# EAGLE board pic_can_relay_v2 (EAGLE 4.16)
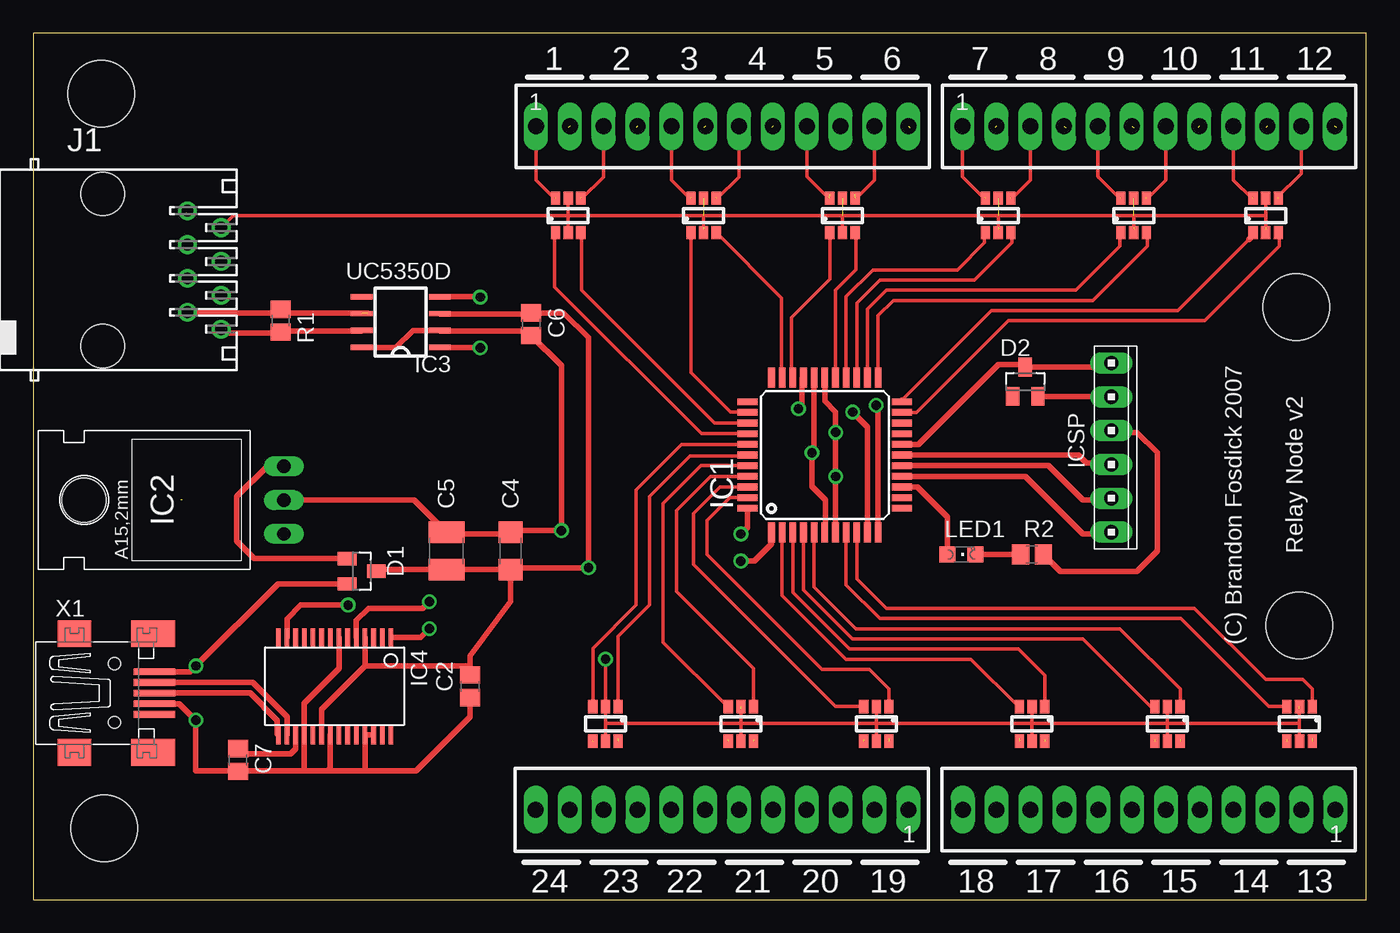
[diagram p0: board, top side]
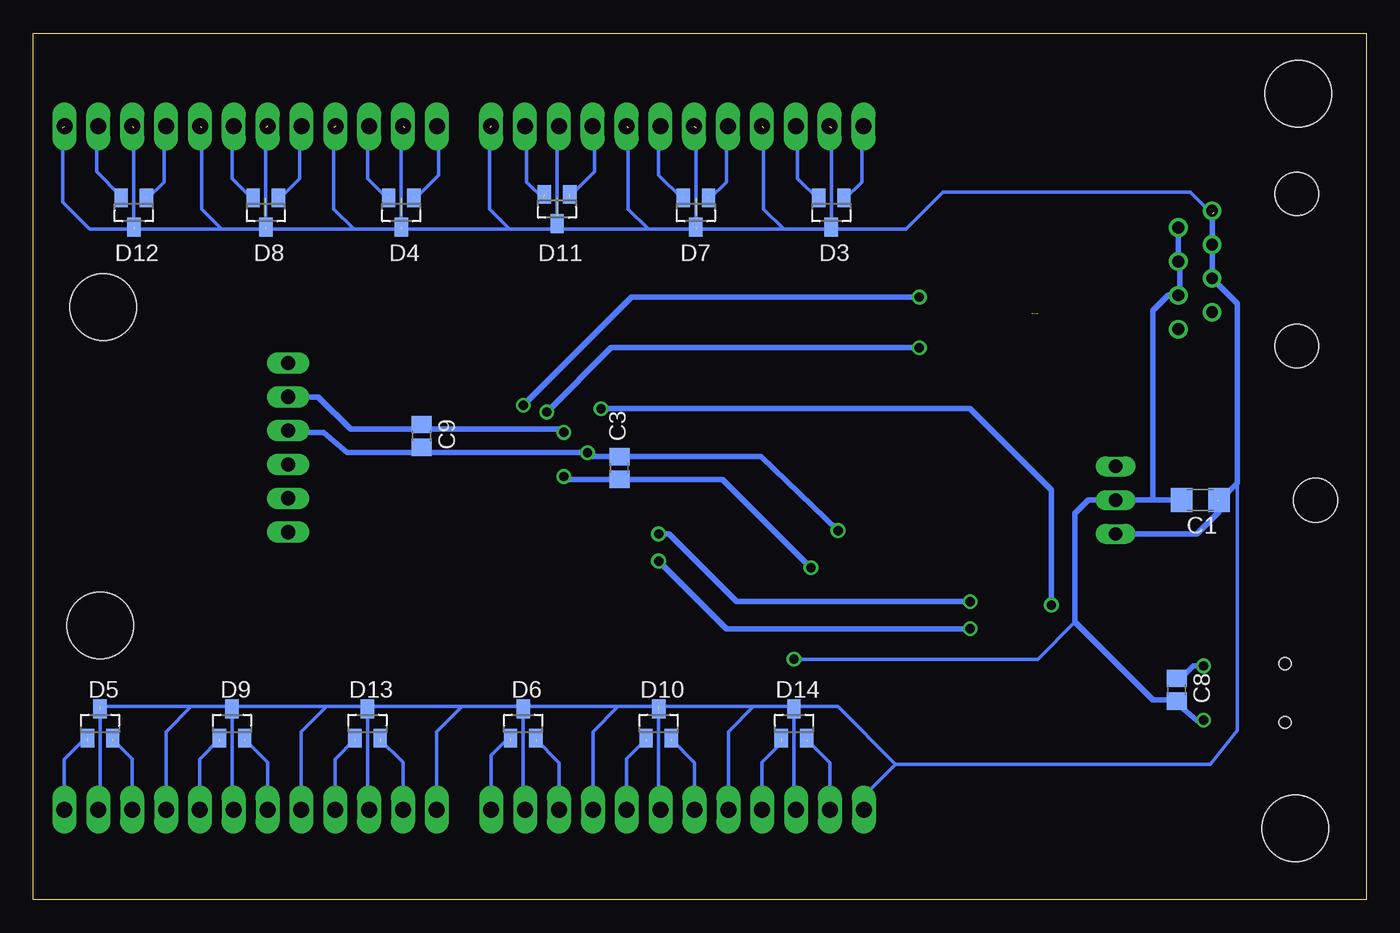
[diagram p1: board, bottom side, seen from below]

Size 100 x 65 mm. Coordinates in mm from the lower left corner, seen from the top.
Outline: 0,0 100,0 100,65 0,65 0,0
Copper layers (1*16): Top 0.035mm / dielectric 1.5mm / Bottom 0.035mm
Design rules "default": minimum track width 10mil, minimum drill 24mil, track to track 8mil, track to pad 8mil, pad to pad 8mil, via to via 8mil, smd to smd 8mil, copper to edge 40mil, drill to drill 8mil, minimum pad ring 10mil, minimum via ring 8mil, stop-mask expansion 0mil, vias tented up to drill 0mil, thermal gap 10mil
Holes 5 mm at 5.08,60.45 5.33,5.33 94.74,44.45 95,20.57

## Footprints (pad centres in the part's own frame; a part is rotated, then mirrored left to right if it is on the bottom)
C1206 = smd 1.6 x 1.8: 1 -1.4,0; 2 1.4,0
C0805 = smd 1.3 x 1.5: 1 -0.85,0; 2 0.85,0
C1210 = smd 1.6 x 2.7: 1 -1.4,0; 2 1.4,0
SOT23 = smd 1 x 1.4: 1 -0.95,-1.1; 2 0.95,-1.1; 3 0,1.1
TQFP44 = smd 1.5 x 0.5: 1 -5.8,4; 2 -5.8,3.2; 3 -5.8,2.4; 4 -5.8,1.6; 5 -5.8,0.8; 6 -5.8,0; 7 -5.8,-0.8; 8 -5.8,-1.6; 9 -5.8,-2.4; 10 -5.8,-3.2; 11 -5.8,-4; 23 5.8,-4; 24 5.8,-3.2; 25 5.8,-2.4; 26 5.8,-1.6; 27 5.8,-0.8; 28 5.8,0; 29 5.8,0.8; 30 5.8,1.6; 31 5.8,2.4; 32 5.8,3.2; 33 5.8,4 | smd 0.5 x 1.5: 12 -4,-5.8; 13 -3.2,-5.8; 14 -2.4,-5.8; 15 -1.6,-5.8; 16 -0.8,-5.8; 17 0,-5.8; 18 0.8,-5.8; 19 1.6,-5.8; 20 2.4,-5.8; 21 3.2,-5.8; 22 4,-5.8; 34 4,5.8; 35 3.2,5.8; 36 2.4,5.8; 37 1.6,5.8; 38 0.8,5.8; 39 0,5.8; 40 -0.8,5.8; 41 -1.6,5.8; 42 -2.4,5.8; 43 -3.2,5.8; 44 -4,5.8
78XXL = drill 1 long: GND 0,-3.81; IN -2.54,-3.81; OUT 2.54,-3.81 | hole 3.302: 0,11.176
SOIC8 = smd 1.626 x 0.406: CANH 2.934,1.27; CANL 2.934,0; GND -2.934,1.27; RS 2.934,2.54; RXD -2.934,-1.27; TXN -2.934,2.54; VCC -2.934,0; VREF 2.934,-1.27
SSOP28DB = smd 0.348 x 1.397: 1 -4.225,-3.656; 2 -3.575,-3.656; 3 -2.925,-3.656; 4 -2.275,-3.656; 5 -1.625,-3.656; 6 -0.975,-3.656; 7 -0.325,-3.656; 8 0.325,-3.656; 9 0.975,-3.656; 10 1.625,-3.656; 11 2.275,-3.656; 12 2.925,-3.656; 13 3.575,-3.656; 14 4.225,-3.656; 15 4.225,3.656; 16 3.575,3.656; 17 2.925,3.656; 18 2.275,3.656; 19 1.625,3.656; 20 0.975,3.656; 21 0.325,3.656; 22 -0.325,3.656; 23 -0.975,3.656; 24 -1.625,3.656; 25 -2.275,3.656; 26 -2.925,3.656; 27 -3.575,3.656; 28 -4.225,3.656
10X06MTA = drill 1.067 long: 1 6.35,0; 2 3.81,0; 3 1.27,0; 4 -1.27,0; 5 -3.81,0; 6 -6.35,0
555166-1 = drill 0.889 round: 1 -4.445,5.207; 2 -3.175,7.747; 3 -1.905,5.207; 4 -0.635,7.747; 5 0.635,5.207; 6 1.905,7.747; 7 3.175,5.207; 8 4.445,7.747 | hole 3.251: -5.715,-1.143; 5.715,-1.143
CHIPLED_0805 = smd 1.2 x 1.2: A 0,-1.05; C 0,1.05
R0805 = smd 1.3 x 1.5: 1 -0.85,0; 2 0.85,0
MPT0.5/12-2.54 = drill 1.2 long: 1 -12.7,0; 2 -10.16,0; 3 -7.62,0; 4 -5.08,0; 5 -2.54,0; 6 0,0; 7 2.54,0; 8 5.08,0; 9 7.62,0; 10 10.16,0; 11 12.7,0; 12 15.24,0
SOT-6 = smd 0.69 x 0.99: 1 -0.95,0; 2 0,0; 3 0.95,0; 4 0.95,2.59; 5 0,2.59; 6 -0.95,2.59
32005-301 = smd 3.1 x 0.5: 1 3,1.6; 2 3,0.8; 3 3,0; 4 3,-0.8; 5 3,-1.6 | smd 2.5 x 2: M1 -3,-4.45; M2 -3,4.45 | smd 3.3 x 2: M3 2.9,4.45; M4 2.9,-4.45 | hole 0.9: 0,2.2; 0,-2.2

## Placement (x,y rotation side)
C1  1uF  [C1206]  12.45,29.97 180 bottom
C2  0.1uF  [C0805]  32.77,16 270 top
C3  0.1uF  [C0805]  56.03,32.38 90 bottom
C4  1uF  [C1206]  35.81,26.16 90 top
C5  10uF  [C1210]  30.99,26.16 90 top
C6  0.1uF  [C0805]  37.36,43.17 270 top
C7  0.1uF  [C0805]  15.36,10.47 270 top
C8  10nF  [C0805]  14.22,15.75 270 bottom
C9  0.1uF  [C0805]  70.87,34.8 270 bottom
D1  BAS70-05  [SOT23]  24.64,24.64 270 top
D2  BAS70-05  [SOT23]  74.42,38.86 0 top
D3  BAS70-05  [SOT23]  40.13,51.56 180 bottom
D4  BAS70-05  [SOT23]  72.39,51.56 180 bottom
D5  BAS70-05  [SOT23]  95,13.21 0 bottom
D6  BAS70-05  [SOT23]  63.25,13.21 0 bottom
D7  BAS70-05  [SOT23]  50.29,51.56 180 bottom
D8  BAS70-05  [SOT23]  82.55,51.56 180 bottom
D9  BAS70-05  [SOT23]  85.09,13.21 0 bottom
D10  BAS70-05  [SOT23]  53.09,13.21 0 bottom
D11  BAS70-05  [SOT23]  60.71,51.82 180 bottom
D12  BAS70-05  [SOT23]  92.46,51.56 180 bottom
D13  BAS70-05  [SOT23]  74.93,13.21 0 bottom
D14  BAS70-05  [SOT23]  42.93,13.21 0 bottom
IC1  PIC18F4580F-I/PT  [TQFP44]  59.38,33.35 90 top
IC2  [78XXL]  14.99,29.97 90 top
IC3  UC5350D  [SOIC8]  27.56,43.97 180 top
IC4  FT232RL  [SSOP28DB]  22.61,16 180 top
ICSP  [10X06MTA]  80.88,33.92 270 top
J1  [555166-1]  6.35,47.24 270 top
LED1  [CHIPLED_0805]  69.63,25.89 270 top
R1  60  [R0805]  18.54,43.43 270 top
R2  270  [R0805]  74.93,25.91 0 top
TB1  MPT0.5/12-2.54  [MPT0.5/12-2.54]  50.41,58.02 0 top
TB2  MPT0.5/12-2.54  [MPT0.5/12-2.54]  82.42,58.02 0 top
TB3  MPT0.5/12-2.54  [MPT0.5/12-2.54]  84.97,6.75 180 top
TB4  MPT0.5/12-2.54  [MPT0.5/12-2.54]  52.94,6.74 180 top
U$1  NDC7002N"  [SOT-6]  40.13,50.04 0 top
U$2  NDC7002N"  [SOT-6]  50.29,50.04 0 top
U$3  NDC7002N"  [SOT-6]  60.71,50.04 0 top
U$4  NDC7002N"  [SOT-6]  72.39,50.04 0 top
U$5  NDC7002N"  [SOT-6]  82.55,50.04 0 top
U$6  NDC7002N"  [SOT-6]  92.46,50.04 0 top
U$7  NDC7002N"  [SOT-6]  95,14.48 180 top
U$8  NDC7002N"  [SOT-6]  85.09,14.48 180 top
U$9  NDC7002N"  [SOT-6]  74.93,14.48 180 top
U$10  NDC7002N"  [SOT-6]  63.25,14.48 180 top
U$11  NDC7002N"  [SOT-6]  53.09,14.48 180 top
U$12  NDC7002N"  [SOT-6]  42.93,14.48 180 top
X1  MINI-USB-32005-301  [32005-301]  6.1,15.49 0 top

## Library data of the parts
C1-C9 R1 R2 = rcl
D1-D14 = diode
IC1 = microchip-pic18f2480_2580_4480_4580
IC2 = v-reg
IC3 TB1-TB4 U$1-U$12 = house
IC4 = ftdichip
ICSP J1 = con-amp
LED1 = led
X1 = con-cypressindustries

## Nets
+5V: C2.1 C3.1 C4.1 C5.1 C6.1 C9.1 D1.3 D2.2 IC1.7 IC1.28 IC3.VCC IC4.4 IC4.20 ICSP.5
+12V: C1.1 D3.3 D4.3 D5.3 D6.3 D7.3 D8.3 D9.3 D10.3 D11.3 D12.3 D13.3 D14.3 IC2.IN J1.1 J1.3 J1.5 TB1.2 TB1.4 TB1.6 TB1.8 TB1.10 TB1.12 TB2.2 TB2.4 TB2.6 TB2.8 TB2.10 TB2.12 TB3.2 TB3.4 TB3.6 TB3.8 TB3.10 TB3.12 TB4.2 TB4.4 TB4.6 TB4.8 TB4.10 TB4.12
CANH: IC3.CANH J1.8 R1.2
CANL: IC3.CANL J1.7 R1.1
CANRX: IC1.11 IC3.RXD
CANTX: IC1.10 IC3.TXN
CLK: IC1.30 IC4.13
G1: IC1.37 U$1.1
G2: IC1.36 U$1.3
G3: IC1.35 U$2.1
G4: IC1.32 U$2.3
G5: IC1.31 U$3.1
G6: IC1.27 U$3.3
G7: IC1.26 U$4.1
G8: IC1.25 U$4.3
G9: IC1.24 U$5.1
G10: IC1.23 U$5.3
G11: IC1.22 U$6.1
G12: IC1.21 U$6.3
G13: IC1.9 U$7.1
G14: IC1.8 U$7.3
G15: IC1.5 U$8.1
G16: IC1.4 U$8.3
G17: IC1.3 U$9.1
G18: IC1.2 U$9.3
G19: IC1.43 U$10.1
G20: IC1.42 U$10.3
G21: IC1.41 U$11.1
G22: IC1.40 U$11.3
G23: IC1.39 U$12.1
G24: IC1.38 U$12.3
GND: C1.2 C2.2 C3.2 C4.2 C5.2 C6.2 C7.2 C8.2 C9.2 IC1.6 IC1.29 IC2.GND IC3.GND IC3.RS IC4.7 IC4.18 IC4.21 IC4.25 IC4.26 ICSP.4 J1.2 J1.4 J1.6 R2.2 U$1.2 U$1.5 U$2.2 U$2.5 U$3.2 U$3.5 U$4.2 U$4.5 U$5.2 U$5.5 U$6.2 U$6.5 U$7.2 U$7.5 U$8.2 U$8.5 U$9.2 U$9.5 U$10.2 U$10.5 U$11.2 U$11.5 U$12.2 U$12.5 X1.4
LED1: IC1.14 LED1.A
MCLR: D2.3 IC1.18 ICSP.6
N$1: D1.1 IC2.OUT
N$2: LED1.C R2.1
N$5: C7.1 IC4.17
PGC: IC1.16 ICSP.2
PGD: IC1.17 ICSP.3
PGM: IC1.15 ICSP.1
PWREN#: IC4.14
R1: D3.1 TB1.1 U$1.6
R2: D3.2 TB1.3 U$1.4
R3: D7.1 TB1.5 U$2.6
R4: D7.2 TB1.7 U$2.4
R5: D11.1 TB1.9 U$3.6
R6: D11.2 TB1.11 U$3.4
R7: D4.1 TB2.1 U$4.6
R8: D4.2 TB2.3 U$4.4
R9: D8.1 TB2.5 U$5.6
R10: D8.2 TB2.7 U$5.4
R11: D12.1 TB2.9 U$6.6
R12: D12.2 TB2.11 U$6.4
R13: D5.1 TB3.1 U$7.6
R14: D5.2 TB3.3 U$7.4
R15: D9.1 TB3.5 U$8.6
R16: D9.2 TB3.7 U$8.4
R17: D13.1 TB3.9 U$9.6
R18: D13.2 TB3.11 U$9.4
R19: D6.1 TB4.1 U$10.6
R20: D6.2 TB4.3 U$10.4
R21: D10.1 TB4.5 U$11.6
R22: D10.2 TB4.7 U$11.4
R23: D14.1 TB4.9 U$12.6
R24: D14.2 TB4.11 U$12.4
RX: IC1.1 IC4.1
TX: IC1.44 IC4.5
USB+: IC4.15 X1.3
USB-: IC4.16 X1.2
USB_5V: C8.1 D1.2 X1.1
USB_SHIELD: X1.5

## Tracks (layer width: path | path; a pad name or v marks a point on that pad's centre or on a via)
+5V  (via drill 0.7)
  Top 0.406: IC4.20 21.63,14.27 24.89,17.53 | IC4.4 24.88,19.57 24.89,19.56 24.89,17.53 | D1.3 25.65,24.64 25.78,24.76 C5.1 30.86,24.76 | C4.1 30.86,24.76 | 30.86,24.76 30.73,24.64 | 32.77,17.53 32.77,18.29 35.81,22.35 C4.1 | 32.77,17.53 C2.1 32.93,16.85 33.02,16.76 | 24.89,17.53 32.77,17.53 | C4.1 35.94,24.89 v41.66,24.89 41.66,28.45 | 41.66,28.45 41.66,28.7 | 41.66,28.45 41.66,42.16 39.8,44.02 C6.1 37.34,44 37.34,43.94 30.52,43.94 IC3.VCC | IC1.28 59.38,37.4 60.2,36.58 v60.2,35.05 v60.2,31.75 60.2,27.69 60.18,27.67 IC1.7 | 80.77,37.59 80.77,37.62 ICSP.5 80.77,37.85 80.69,37.76 D2.2
  Bottom 0.406: v60.2,31.75 60.16,31.53 C3.1 48.29,31.53 v41.66,24.89 | ICSP.5 78.62,37.73 76.2,35.31 70.36,35.31 | 70.36,35.31 59.94,35.31 v60.2,35.05 | 70.36,35.31 C9.1
+12V  (19 unrouted)
  Bottom 0.254: 11.56,51.44 13.21,53.09 31.75,53.09 34.54,50.29 40.13,50.29 | 40.13,50.29 D3.3 | 97.79,57.91 97.79,52.32 95.76,50.29 92.46,50.29 | 40.13,50.29 43.69,50.29 | 43.69,50.29 50.29,50.29 | 50.29,50.29 53.85,50.29 | 53.85,50.29 60.71,50.29 | 60.71,50.29 64.26,50.29 | 64.26,50.29 72.39,50.29 | 72.39,50.29 75.95,50.29 | 75.95,50.29 82.55,50.29 | 82.55,50.29 85.85,50.29 | 85.85,50.29 92.46,50.29 | 92.46,50.29 92.46,57.91 | 82.55,50.29 82.55,57.91 | 72.39,50.29 72.39,57.66 72.14,57.91 | 50.29,50.29 50.29,57.91 | 40.13,50.29 40.13,57.91 | 87.38,57.91 87.38,51.82 85.85,50.29 | 77.47,57.91 77.47,51.82 75.95,50.29 | 65.79,57.91 65.79,51.82 64.26,50.29 | 55.37,57.91 55.37,51.82 53.85,50.29 | 45.21,57.91 45.21,51.82 43.69,50.29 | TB3.2 95,6.88 D5.3 | 85.09,14.48 88.14,14.48 | 88.14,14.48 95,14.48 | 56.13,14.48 53.09,14.48 45.97,14.48 | 56.13,14.48 63.25,14.48 | 63.25,14.48 67.82,14.48 | 67.82,14.48 74.93,14.48 | 74.93,14.48 77.98,14.48 | 77.98,14.48 85.09,14.48 | 42.93,14.48 45.97,14.48 | TB3.4 90.05,12.57 88.14,14.48 | 85.09,14.48 D9.3 | TB3.6 85.09,6.87 85.09,14.48 | TB3.8 79.89,12.57 77.98,14.48 | 74.93,14.22 D13.3 74.93,14.48 | TB3.12 69.73,12.57 67.82,14.48 | 63.25,14.48 D6.3 | TB4.2 63.25,6.88 63.25,14.48 | TB4.4 58.02,12.59 56.13,14.48 | TB4.6 53.09,6.88 D10.3 | TB4.8 47.86,12.59 45.97,14.48 | 42.93,14.48 D14.3 | TB4.10 arc90 42.93,6.88 42.93,14.48 | 11.18,29.97 11.18,29.21 | 35.31,10.16 11.68,10.16 9.65,12.7 9.65,31.24 | 35.31,10.16 39.62,14.48 42.93,14.48 | TB4.12 37.7,7.77 35.31,10.16 | TB3.10 arc90 74.93,6.87 74.93,14.48 | 60.71,50.29 60.71,50.55 | 60.71,50.55 D11.3 | TB1.10 60.71,57.89 60.71,50.55
  Bottom 0.406: IC2.IN 12.7,27.43 11.05,29.09 C1.1 10.92,29.97 9.65,31.24 9.65,44.7 J1.5 | J1.5 11.68,46.74 | J1.5 11.56,48.9 11.43,49.02 J1.3 11.56,51.44 | J1.1 11.43,51.56
CANH
  Top 0.406: J1.8 14.45,42.63 14.45,42.52 18.57,42.52 | 18.57,42.52 R1.2 | IC3.CANH 24.64,42.69 24.64,42.67 18.72,42.67 18.57,42.52
CANL  (1 unrouted)
  Top 0.406: J1.7 11.95,44.02 18.43,44.02 R1.1 18.77,44.02 25.07,44.02
CANRX  (via drill 0.7)
  Top 0.406: v33.53,45.21 33.78,45.21 33.75,45.24 IC3.RXD | IC1.11 63.38,36.95 v63.25,37.08
  Bottom 0.406: v33.53,45.21 55.12,45.21 v63.25,37.08
CANTX  (via drill 0.7)
  Top 0.406: IC3.TXN 33.5,41.43 v33.53,41.4 | IC1.10 62.58,35.47 v61.47,36.58
  Bottom 0.406: v33.53,41.4 56.64,41.4 v61.47,36.58
CLK  (via drill 0.7)
  Top 0.406: IC4.13 19.03,21.06 20.07,22.1 v23.62,22.1 | IC1.30 57.74,39.12 57.66,39.12 57.66,37.08 v57.4,36.83
  Bottom 0.406: v23.62,22.1 23.62,30.73 29.72,36.83 v57.4,36.83
G1
  Top 0.254: IC1.37 50.14,34.95 39.12,45.97 39.12,50.04 U$1.1
G2
  Top 0.254: IC1.36 51.12,35.75 41.15,45.72 41.15,50.04 U$1.3
G3
  Top 0.254: U$2.1 49.34,39.56 52.32,36.58 53.59,36.58 53.58,36.56 IC1.35
G4
  Top 0.254: IC1.32 56.14,39.12 56.13,39.12 56.13,45.15 U$2.3
G5
  Top 0.254: IC1.31 56.94,39.12 56.9,39.12 56.9,43.69 59.76,46.55 U$3.1
G6
  Top 0.254: IC1.27 60.18,45.74 61.72,47.28 61.72,50.04 U$3.3
G7
  Top 0.254: IC1.26 60.98,45.23 62.99,47.24 69.34,47.24 71.37,49.28 71.37,50.04 U$4.1
G8
  Top 0.254: IC1.25 61.78,44.76 63.5,46.48 70.61,46.48 73.41,49.28 73.41,50.04 U$4.3
G9
  Top 0.254: IC1.24 62.58,44.29 64.01,45.72 78.23,45.72 81.53,49.02 81.53,50.04 U$5.1
G10
  Top 0.254: IC1.23 63.38,43.82 64.52,44.96 79.5,44.96 83.57,49.02 83.57,50.04 U$5.3
G11
  Top 0.254: 65.18,37.49 71.88,44.2 85.85,44.2 91.19,49.53 | U$6.1 91.44,50.04 91.44,49.78
  Top 0.406: IC1.22 65.18,37.49 | 91.19,49.53 91.44,49.78
G12
  Top 0.254: IC1.21 66.27,36.55 73.15,43.43 87.88,43.43 93.47,49.02 93.47,50.04 U$6.3
G13
  Top 0.254: IC1.9 61.78,24.07 64.01,21.84 87.12,21.84 92.46,16.51 95.25,16.51 95.95,15.81 U$7.1
G14
  Top 0.254: IC1.8 60.98,23.6 63.5,21.08 86.11,21.08 92.71,14.48 U$7.3
G15
  Top 0.254: IC1.5 58.58,23.46 61.72,20.32 80.77,20.32 81.53,20.32 86.04,15.81 U$8.1
G16
  Top 0.254: IC1.4 57.78,23.25 61.47,19.56 78.74,19.56 83.82,14.48 U$8.3
G17
  Top 0.254: IC1.3 56.98,23.03 61.21,18.8 73.91,18.8 75.88,16.83 U$9.1
G18
  Top 0.254: IC1.2 56.18,22.81 60.96,18.03 70.36,18.03 73.91,14.48 U$9.3
G19
  Top 0.254: IC1.43 52.25,30.15 50.55,28.45 50.55,25.91 59.18,17.27 62.74,17.27 64.2,15.81 U$10.1
G20
  Top 0.254: IC1.42 51.53,30.95 49.53,28.96 49.53,25.15 60.2,14.48 U$10.3
G21
  Top 0.254: IC1.41 50.8,31.75 48.26,29.21 48.26,23.11 54.04,17.34 U$11.1
G22
  Top 0.254: IC1.40 50.08,32.55 47.24,29.72 47.24,22.61 47.24,19.3 52.07,14.48 U$11.3
G23
  Top 0.254: 53.5,33.27 49.28,33.27 46.23,30.23 46.23,22.1 43.88,19.75 U$12.1
  Top 0.406: 53.5,33.27 IC1.39
G24
  Top 0.254: IC1.38 48.63,34.15 45.21,30.73 45.21,22.1 41.98,18.86 U$12.3
GND  (via drill 0.7)  (4 unrouted)
  Top 0.254: 40.13,51.31 U$1.5 | 40.13,51.31 50.29,51.31 | 50.29,51.31 60.71,51.31 | 60.71,51.31 72.39,51.31 | 72.39,51.31 82.55,51.31 | 82.55,51.31 92.46,51.31 | 92.46,51.31 U$6.5 | 92.46,51.31 U$6.2 | 82.55,51.31 U$5.2 | 72.39,51.31 U$4.2 | 60.71,51.31 U$3.2 | 50.29,51.31 U$2.2 | 40.13,51.31 U$1.2 | 13.97,50.29 J1.2 14.99,51.31 40.13,51.31 | 95,13.21 U$7.5 | 42.93,13.21 53.09,13.21 | 53.09,13.21 63.25,13.21 | 63.25,13.21 74.93,13.21 | 74.93,13.21 85.09,13.21 | 85.09,13.21 95,13.21 | 42.93,13.21 U$12.5 | 42.93,13.21 U$12.2 v42.93,18.03 | 53.09,13.21 U$11.2 | 53.09,13.21 U$11.5 | 63.25,13.21 U$10.5 | 63.25,13.21 U$10.2 | 74.93,13.21 U$9.5 | 74.93,13.21 U$9.2 | 85.09,13.21 U$8.2 | 85.09,13.21 U$8.5 | 95,13.21 U$7.2
  Top 0.406: X1.4 10.96,14.69 v12.19,13.46 12.19,9.65 15.49,9.65 | 20.32,9.65 20.33,11.19 IC4.18 20.33,12.2 20.32,12.19 20.32,14.73 22.93,17.34 IC4.7 | 15.49,9.65 20.32,9.65 | 20.32,9.65 22.1,9.65 | 22.1,9.65 24.89,9.65 | IC4.26 25.05,12.35 24.89,12.19 24.88,12.2 IC4.25 24.88,10.91 24.89,9.65 | IC4.21 22.28,9.84 22.1,9.65 | C2.2 32.77,13.72 28.7,9.65 24.89,9.65 | IC2.GND 28.58,29.97 C5.2 30.99,27.43 35.68,27.43 C4.2 35.94,27.69 v39.62,27.69 39.62,40.06 C6.2 37.08,42.6 37.08,42.67 30.52,42.67 IC3.GND 28.48,42.7 27.18,41.4 24.64,41.4 24.62,41.41 IC3.RS 27.15,41.43 | C7.2 15.46,9.62 15.49,9.65 | IC1.29 58.58,33.53 v58.42,33.53 58.42,30.99 59.44,29.97 59.44,27.69 59.38,27.63 IC1.6 | R2.2 77.05,24.64 82.8,24.64 84.33,26.16 84.33,33.53 82.8,35.05 80.77,35.05 80.88,35.16 ICSP.4
  Bottom 0.254: 21.84,20.83 24.64,18.03 v42.93,18.03
  Bottom 0.406: 14.22,14.73 12.7,13.46 v12.19,13.46 11.94,13.46 | 16,29.97 C1.2 | 16,29.97 IC2.GND 20.83,29.97 21.84,28.96 21.84,20.83 16,14.99 14.48,14.99 14.22,14.73 | 16,29.97 16,44.2 14.86,45.34 J1.6 13.97,45.47 13.97,48.01 J1.4 J1.2 13.97,50.55 | 14.22,14.73 C8.2 | 70.87,33.53 v58.42,33.53 58.12,33.23 C3.2 45.42,33.23 v39.62,27.69 | 70.87,33.53 76.45,33.53 78.23,35.05 80.77,35.05 80.91,35.19 | 80.91,35.19 81.03,35.31 | 80.91,35.19 ICSP.4 | 70.87,33.53 C9.2
LED1
  Top 0.406: IC1.14 66.33,30.95 68.58,28.7 68.58,25.91 LED1.A
MCLR
  Top 0.406: IC1.18 66.41,34.15 72.39,40.13 74.17,40.13 74.42,39.88 D2.3 80.6,39.96 80.91,40.27 | 80.91,40.27 81.03,40.39 | 80.91,40.27 ICSP.6
N$1
  Top 0.406: IC2.OUT 17.53,32.51 15.24,30.23 15.24,26.92 16.58,25.59 D1.1
N$2
  Top 0.406: R2.1 74.17,25.91 74.15,25.89 LED1.C
N$3
  Bottom 0.254: 96.01,12.19 96.01,11.94
N$5
  Top 0.406: IC4.17 19.68,11.3 19.3,10.92 15.75,10.92 15.36,11.31 C7.1
N$7
  Bottom 0.254: 95.25,57.91 95.25,54.61 93.47,52.83
N$8
  Bottom 0.254: 90.17,57.91 90.17,53.85 91.44,52.58
N$9
  Bottom 0.254: 85.09,57.91 85.09,54.1 83.57,52.58
N$11
  Bottom 0.254: 80.01,57.91 80.01,54.1 81.53,52.58
N$12
  Bottom 0.254: 74.93,57.91 74.93,54.1 73.41,52.58
N$13
  Bottom 0.254: 69.6,57.91 69.6,54.36 71.37,52.58
N$14
  Bottom 0.254: 62.99,57.91 62.99,53.85 61.72,52.58
N$15
  Bottom 0.254: 57.91,57.91 57.91,54.61 59.69,52.83
N$16
  Bottom 0.254: 53.09,57.91 53.09,54.36 51.31,52.58
N$17
  Bottom 0.254: 48.01,57.91 48.01,53.85 49.28,52.58
N$18
  Bottom 0.254: 42.67,57.91 42.67,54.1 41.15,52.58
N$19
  Bottom 0.254: 37.85,57.91 37.85,53.85 39.12,52.58
PGC
  Top 0.406: IC1.16 76.16,32.55 78.74,29.97 80.77,29.97 80.88,30.08 ICSP.2
PGD
  Top 0.406: IC1.17 78.41,33.35 78.99,32.77 80.52,32.77 80.77,32.51 80.88,32.62 ICSP.3
PGM
  Top 0.406: IC1.15 74.42,31.75 78.74,27.43 80.52,27.43 80.77,27.69 ICSP.1
R1  (1 unrouted)
  Top 0.254: U$1.6 39.17,52.63 39.12,52.58 37.71,53.98 TB1.1
R2  (1 unrouted)
  Top 0.254: U$1.4 41.1,52.63 41.15,52.58 42.79,54.22 TB1.3
R3  (1 unrouted)
  Top 0.254: U$2.6 49.33,52.63 49.28,52.58 47.87,53.98 TB1.5
R4  (1 unrouted)
  Top 0.254: U$2.4 51.26,52.63 51.31,52.58 52.95,54.22 TB1.7
R5  (1 unrouted)
  Top 0.254: U$3.6 59.74,52.63 59.69,52.58 58.03,54.23 TB1.9
R6  (1 unrouted)
  Top 0.254: U$3.4 61.67,52.63 61.72,52.58 63.11,53.97 TB1.11
R7  (1 unrouted)
  Top 0.254: U$4.6 71.42,52.63 71.37,52.58 69.72,54.23 TB2.1
R8  (1 unrouted)
  Top 0.254: U$4.4 73.36,52.63 73.41,52.58 74.8,53.97 TB2.3
R9  (1 unrouted)
  Top 0.254: U$5.6 81.58,52.63 81.53,52.58 79.88,54.23 TB2.5
R10  (1 unrouted)
  Top 0.254: U$5.4 83.52,52.63 83.57,52.58 84.96,53.97 TB2.7
R11  (1 unrouted)
  Top 0.254: U$6.6 91.49,52.63 91.44,52.58 90.04,53.98 TB2.9
R12  (1 unrouted)
  Top 0.254: 93.27,52.63 93.22,52.58 | U$6.4 93.27,52.63 | TB2.11 95.12,54.48 93.27,52.63
R13  (1 unrouted)
  Bottom 0.254: D5.1 95.95,12.13 96.01,12.19 97.67,10.54 TB3.1
R14  (1 unrouted)
  Bottom 0.254: D5.2 94.05,12 92.59,10.55 TB3.3
R15  (1 unrouted)
  Bottom 0.254: D9.1 86.04,12 87.51,10.54 TB3.5
R16  (1 unrouted)
  Bottom 0.254: D9.2 84.14,12 82.43,10.29 TB3.7
R17  (1 unrouted)
  Bottom 0.254: D13.1 75.88,12 77.35,10.54 TB3.9
R18  (1 unrouted)
  Bottom 0.254: 74.08,12.11 74.17,12.19 | 74.08,12.11 D13.2 | TB3.11 72.27,10.29 74.08,12.11
R19  (1 unrouted)
  Bottom 0.254: D6.1 64.2,12.13 64.26,12.19 65.64,10.81 TB4.1
R20  (1 unrouted)
  Bottom 0.254: D6.2 62.3,12 60.56,10.27 TB4.3
R21  (1 unrouted)
  Bottom 0.254: D10.1 54.04,12 55.48,10.56 TB4.5
R22  (1 unrouted)
  Bottom 0.254: D10.2 52.14,12 50.4,10.27 TB4.7
R23  (1 unrouted)
  Bottom 0.254: D14.1 43.88,12.13 43.94,11.68 45.32,10.31 TB4.9
R24  (1 unrouted)
  Bottom 0.254: D14.2 41.98,12.13 41.91,11.94 40.24,10.27 TB4.11
RX  (via drill 0.7)
  Top 0.406: IC1.1 55.38,26.68 54.1,25.4 v53.09,25.4 | IC4.1 29.06,19.66 v29.72,20.32
  Bottom 0.406: v29.72,20.32 48.01,20.32 v53.09,25.4
TX  (via drill 0.7)
  Top 0.406: IC1.44 53.58,27.93 v53.09,27.43 | IC4.5 24.23,20.93 25.15,21.84 29.21,21.84 v29.72,22.35
  Bottom 0.406: v29.72,22.35 47.24,22.35 52.32,27.43 v53.09,27.43
USB+
  Top 0.406: X1.3 16.26,15.49 18.29,13.46 18.29,12.45 IC4.15
USB-
  Top 0.406: X1.2 16.47,16.29 19.05,13.72 19.05,12.45 19.03,12.43 IC4.16
USB_5V  (via drill 0.7)
  Top 0.406: X1.1 11.76,17.09 v12.19,17.53 18.35,23.69 D1.2
  Bottom 0.406: C8.1 14.22,16.26 12.95,17.53 v12.19,17.53

## Text on the board
Top: 1 Top
Bottom: 16 Bottom
Pads: 17 Pads
Vias: 18 Vias
Dimension: 20 Dimension
tPlace: 21 tPlace
tNames: 25 tName | 1 | 2 | 3 | 4 | 5 | 6 | 7 | 8 | 9 | 10 | 11 | 12 | Relay Node v2 | (C) Brandon Fosdick 2007 | 24 | 23 | 22 | 21 | 20 | 19 | 18 | 17 | 16 | 15 | 14 | 13
tStop: 29 tStop
bStop: 30 bStop